# Altium PCB altium-experimental.pcbdoc
Units mil, origin at the board's own origin, x right, y up, seen from the top; angles counter-clockwise.
Board outline 5299.4 x 4105 mil, 2 copper layers (Top Layer, Bottom Layer); 37 components, 25 nets, 153 pads, 6 vias.
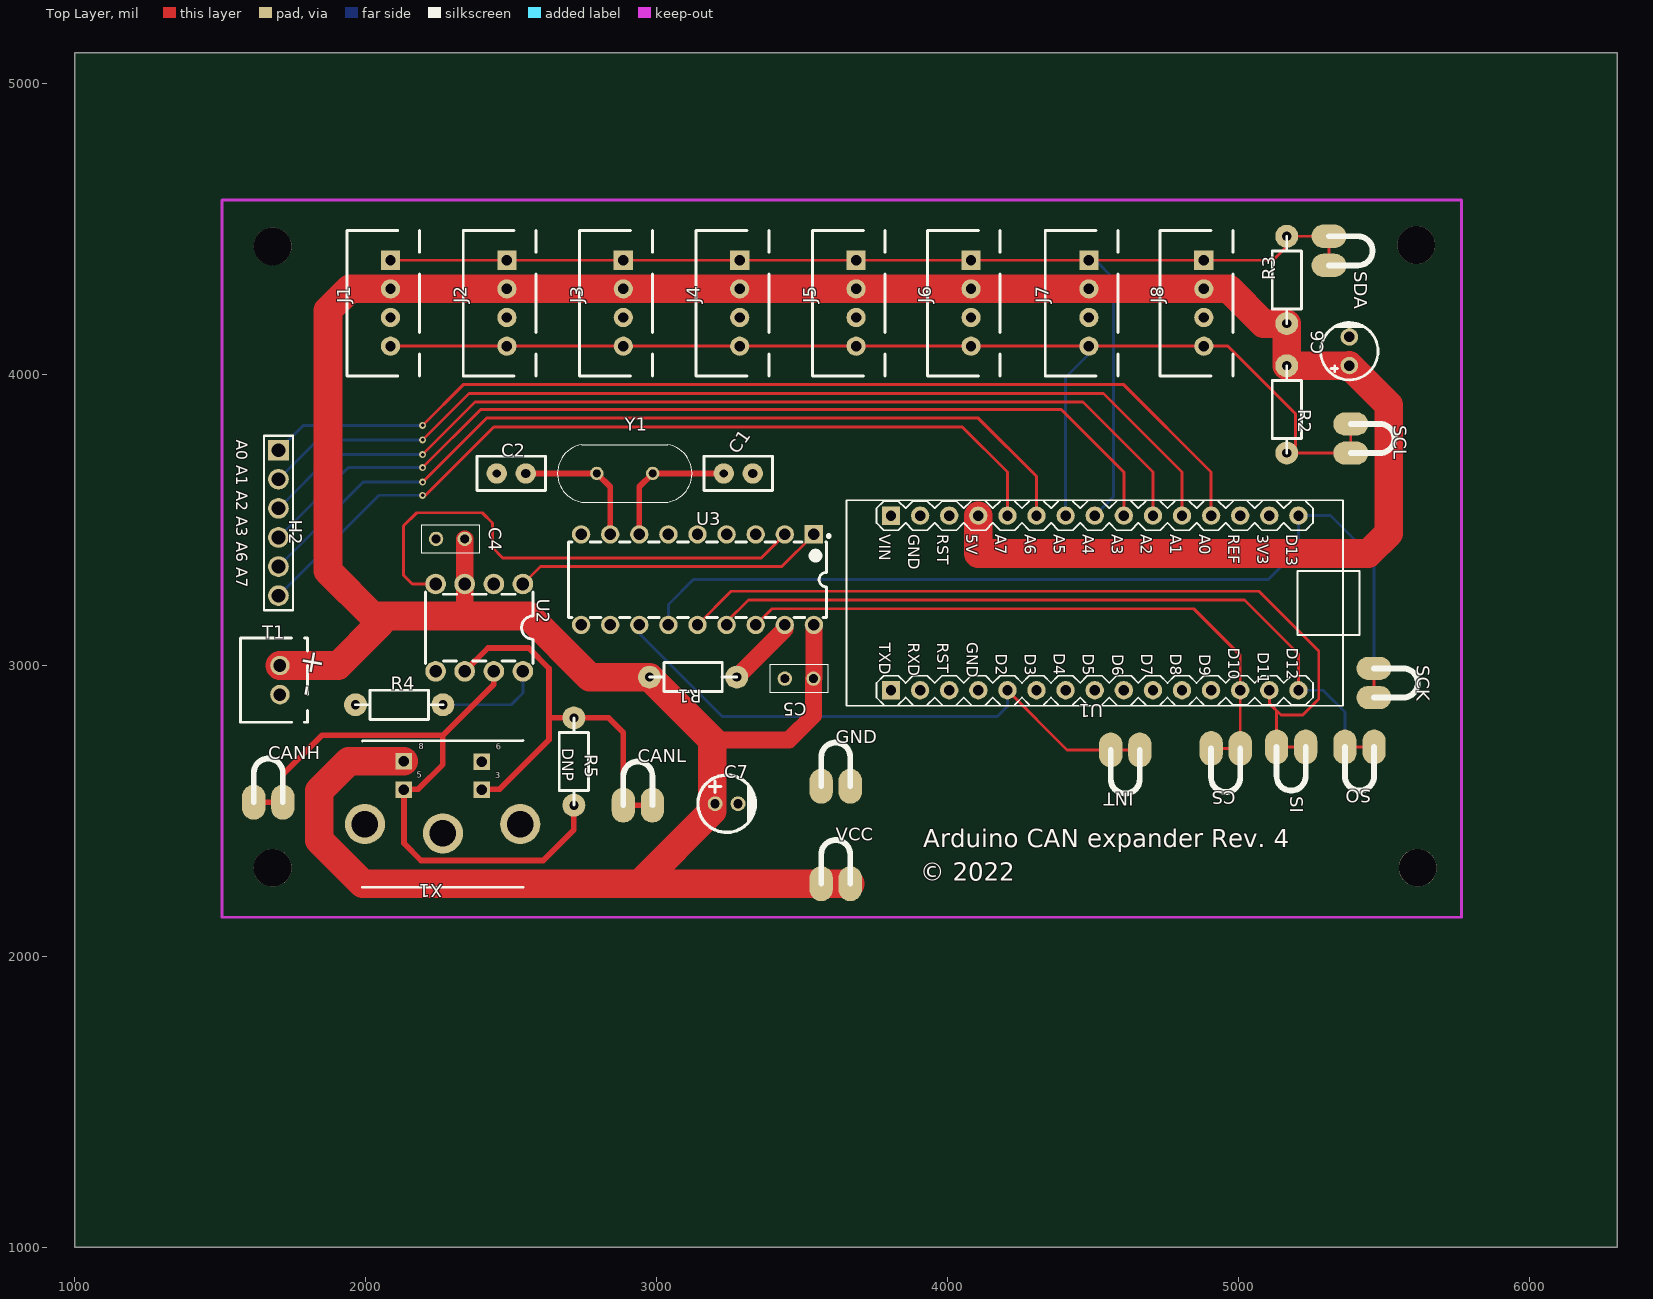
[diagram p0: Top Layer view]
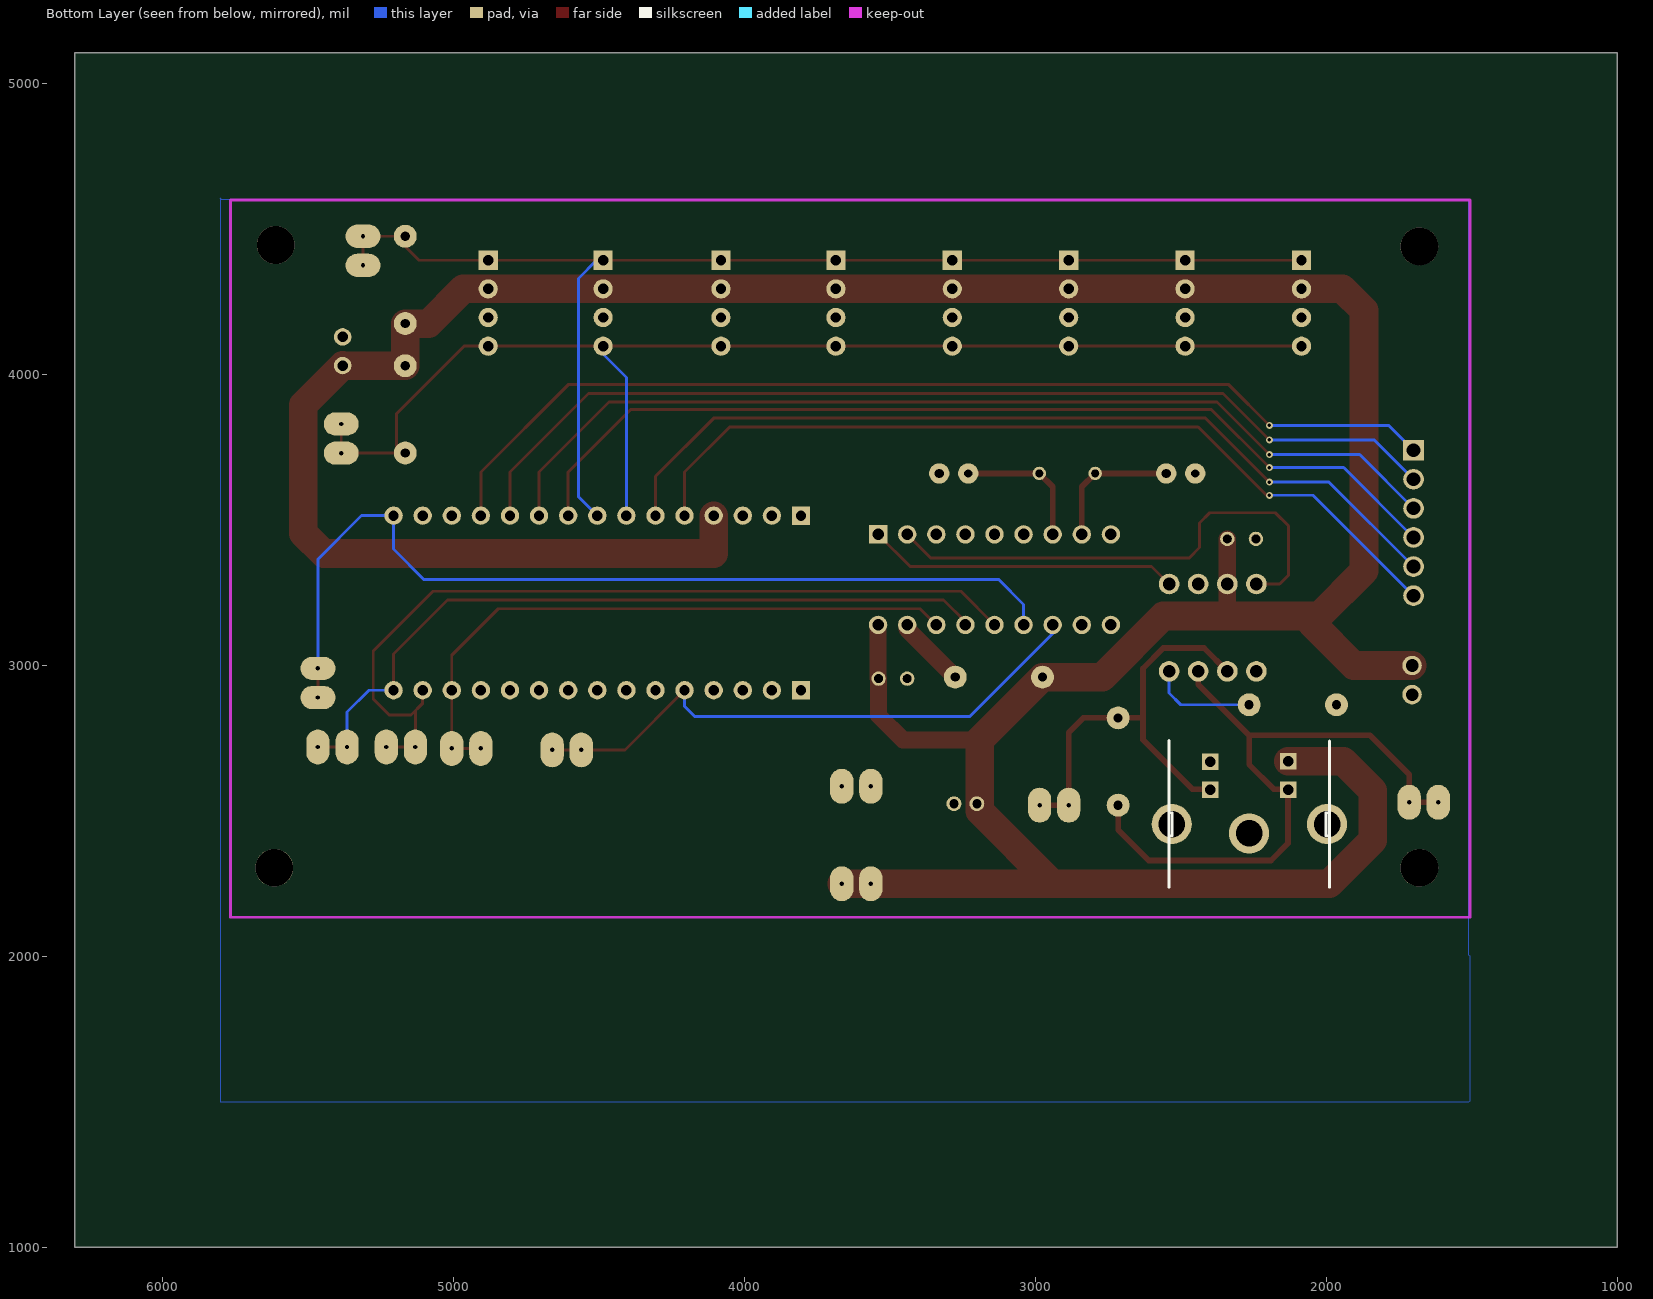
[diagram p1: Bottom Layer view, seen from below]

## Layer stack, top to bottom
Top Layer: signal copper (thickness not stored)
Dielectric: dielectric 12.6, FR-4, Dk 4.8
Bottom Layer: signal copper (thickness not stored)

## Board outline
6299.4,1000 1000,1000 1000,5105 6299.4,5105

## Components (designator, comment, footprint, x,y, rotation, side; value= is the part's Value field where it differs from the comment)
C1 "27pF" "CAPACITOR CERAMIC 2.5MM" 3279.4,3660 r270 top
C2 "27pF" "CAPACITOR CERAMIC 2.5MM" 2499.4,3660 r270 top
C4 "0.1uF" "CERAMIC MURATA 0.1UF 50V" 2339.4,3435 r180 top
C5 "0.1uF" "CERAMIC MURATA 0.1UF 50V" 3439.4,2955 r0 top
C6 "22uF" CAP-TH_BD5.0-P2.5-D0.5-FD 5379.4,4080 r90 top
C7 "100uF" CAP-TH_BD5.0-P2.00-D0.8-FD 3239.4,2525 r0 top
CANH "Test Point Loop" TEST-POINT-LOOP 1614.4,2530 r0 top
CANL "Test Point Loop" TEST-POINT-LOOP 2884.4,2520 r0 top
CS "Test Point Loop" TEST-POINT-LOOP 5004.4,2715 r180 top
GND "Test Point Loop" TEST-POINT-LOOP 3564.4,2585 r0 top
H2 "2.54 male" HDR-TH_6P-P2.54-V-M-1 1699.4,3490 r270 top
INT "Test Point Loop" TEST-POINT-LOOP 4659.4,2710 r180 top
J1 "JST-XH" JST-XH-4PIN-2.5#1 2084.4,4244.99 r90 top
J2 "JST-XH" JST-XH-4PIN-2.5#1 2484.4,4245 r90 top
J3 "JST-XH" JST-XH-4PIN-2.5#1 2884.4,4244.99 r90 top
J4 "JST-XH" JST-XH-4PIN-2.5#2 3284.4,4245 r90 top
J5 "JST-XH" JST-XH-4PIN-2.5#1 3684.4,4244.99 r90 top
J6 "JST-XH" JST-XH-4PIN-2.5#1 4079.4,4245 r90 top
J7 "JST-XH" JST-XH-4PIN-2.5#1 4484.4,4245 r90 top
J8 "JST-XH" JST-XH-4PIN-2.5#1 4879.4,4244.99 r90 top
R1 "10K" RESISTOR-AXIAL 3124.4,2960 r180 top
R2 "1.8K" RESISTOR-AXIAL 5164.4,3880 r270 top
R3 "1.8K" RESISTOR-AXIAL 5164.4,4325 r90 top
R4 "10K" RESISTOR-AXIAL 2114.4,2865 r180 top
R5 "DNP" RESISTOR-AXIAL 2714.43,2669.97 r270 top
SCK "Test Point Loop" TEST-POINT-LOOP 5464.4,2990 r270 top
SCL "Test Point Loop" TEST-POINT-LOOP 5384.4,3830 r270 top
SDA "Test Point Loop" TEST-POINT-LOOP 5309.4,4475 r270 top
SI "Test Point Loop" TEST-POINT-LOOP 5229.4,2720 r180 top
SO "Test Point Loop" TEST-POINT-LOOP 5464.4,2720 r180 top
T1 "JST XH 2P" "JST XH P2" 1704.4,2950 r90 top
U1 "ARDUINO_NANO" COMM-TH_ARDUINO_NANO 4504.4,3215 r180 top
U2 "MCP2551-I/P" PDIP-8_L9.3-W6.4-P2.54-LS7.6-BL 2389.4,3130 r180 top
U3 "MCP2515-I/P" PDIP-18_L22.5-W6.6-P2.54-LS7.9-BL 3139.4,3295 r180 top
VCC "Test Point Loop" TEST-POINT-LOOP 3564.4,2250 r0 top
X1 "MINI-DIN-4" M_DIN4 2264.4,2425 r180 top
Y1 "8Mhz 18pF" HC/49US_(AT49)PTH 2889.4,3660 r0 top

## Footprints (in the part's own frame and the unit in brackets; to place one, negate y for a bottom-side part, rotate by r counter-clockwise, add the part's x,y. Pads: shape width x height; smd on the part's side, far side on the other; paste and mask are expansions set on the pad)
CAP-TH_BD5.0-P2.00-D0.8-FD [mm]
  round 1.3 hole 0.8: 1(-1,0) 2(1,0)
  silkscreen extent -2.5,-2.5 2.5,2.5
CAP-TH_BD5.0-P2.5-D0.5-FD [mil]
  round 60 hole 36: 1(-49.21,0) 2(49.21,0)
  silkscreen extent -98,-98 98,98
"CAPACITOR CERAMIC 2.5MM" [mil]
  round 70 hole 31.5: 1(0,50)
  round 70 hole 28: 2(0,-50)
  silkscreen extent -59,-118 59,118
"CERAMIC MURATA 0.1UF 50V" [mil]
  round 49.53 hole 29.52 slot 29.53 at 0 deg: 1(0,0) 2(98.42,0)
  silkscreen extent -49,-49 148,49
COMM-TH_ARDUINO_NANO [mm]
  rect 1.6x1.6 hole 0.9: 1(17.78,7.62) 30(17.78,-7.62)
  round 1.6 hole 0.9: 2(15.24,7.62) 3(12.7,7.62) 4(10.16,7.62) 5(7.621,7.62) 6(5.08,7.62) 7(2.541,7.62) 8(0,7.62) 9(-2.539,7.62) 10(-5.08,7.62) 11(-7.619,7.62) 12(-10.16,7.62) 13(-12.699,7.62) 14(-15.24,7.62) 15(-17.78,7.62) 16(-17.78,-7.62) 17(-15.241,-7.62) 18(-12.7,-7.62) 19(-10.161,-7.62) 20(-7.62,-7.62) 21(-5.081,-7.62) 22(-2.54,-7.62) 23(-0.001,-7.62) 24(2.54,-7.62) 25(5.079,-7.62) 26(7.62,-7.62) 27(10.159,-7.62) 28(12.7,-7.62) 29(15.24,-7.62)
  silkscreen extent -23.11,-8.97 21.67,8.97
HC/49US_(AT49)PTH [mil]
  round 45.98 hole 25.98 slot 26.18 at 0 deg: 1(-96.06,0) 2(96.06,0)
  silkscreen extent -232,-98 232,98
HDR-TH_6P-P2.54-V-M-1 [mm]
  rect 1.8x1.8 hole 1.2: 1(-6.35,0)
  round 1.8 hole 1.2: 2(-3.81,0) 3(-1.27,0) 4(1.27,0) 5(3.81,0) 6(6.35,0)
  silkscreen extent -7.62,-1.27 7.62,1.27
"JST XH P2" [mm]
  round 1.7 hole 1.1: 1(1.27,0) 2(-1.27,0)
  silkscreen extent -3.68,-2.41 3.68,3.43
JST-XH-4PIN-2.5#1 [mil]
  rect 66x66 hole 35.43: 1(147.64,0)
  round 66 hole 35.43: 2(49.21,0) 3(-49.21,0) 4(-147.64,0)
  silkscreen extent -250,-100 250,150
JST-XH-4PIN-2.5#2 [mil]
  rect 66x65.98 hole 35.43: 1(147.64,0)
  round 66 hole 35.43: 2(49.21,0) 3(-49.21,0) 4(-147.64,0)
  silkscreen extent -250,-100 250,150
M_DIN4 [mil]
  rect 56x56 hole 35.4: 3(-134,-148) 5(134,-148) 6(-134,-244) 8(134,-246)
  round 137.8 hole 90.6: SH1(268,-30) SH2(0,2) SH3(-266,-30)
  silkscreen extent -276,-317 276,187
PDIP-8_L9.3-W6.4-P2.54-LS7.6-BL [mm]
  round 1.8 hole 1.1: 1(-3.81,-3.81) 2(-1.27,-3.81) 3(1.27,-3.81) 4(3.81,-3.81) 5(3.81,3.81) 6(1.27,3.81) 7(-1.27,3.81) 8(-3.81,3.81)
  silkscreen extent -4.7,-3.11 4.7,3.11
PDIP-18_L22.5-W6.6-P2.54-LS7.9-BL [mm]
  rect 1.6x1.6 hole 1: 1(-10.16,-3.95)
  round 1.6 hole 1: 2(-7.62,-3.95) 3(-5.08,-3.95) 4(-2.54,-3.95) 5(0,-3.95) 6(2.54,-3.95) 7(5.08,-3.95) 8(7.62,-3.95) 9(10.16,-3.95) 10(10.16,3.95) 11(7.62,3.95) 12(5.08,3.95) 13(2.54,3.95) 14(0,3.95) 15(-2.54,3.95) 16(-5.08,3.95) 17(-7.62,3.95) 18(-10.16,3.95)
  silkscreen extent -11.58,-3.93 11.25,3.3
RESISTOR-AXIAL [mm]
  round 2 hole 0.8: 1(-3.81,0) 2(3.81,0)
  silkscreen extent -3.81,-1.27 3.81,1.27
TEST-POINT-LOOP [mil]
  oval 80x120 hole 15: 1(0,0) 1(100,0)
  silkscreen extent 0,0 100,150

## Free pads (board coordinates)
  round 129.92 hole 129.92 unplated: ""(1679.4,2305) ""(1679.4,4440) ""(5609.4,4445) ""(5614.4,2305)

## Via types
v1: diameter 24.02, hole 12, Top Layer to Bottom Layer, tented both sides, 6 vias

## Nets (pads, with @x,y where several pads share a name; then routed paths per layer and width w, separated by ;. In a path a pad name is that pad's centre, name@x,y a point inside that pad or via, vN(x,y) a via of type N, cw(c..) or ccw(c..) an arc to the next point about the centre after c; other vN are vias at no path point)
GND: C1.1 C2.2 C4.2 C5.1 C6.2 C7.2 GND.1 J1.3 J2.3 J3.3 J4.3 J5.3 J6.3 J7.3 J8.3 R4.2 T1.2 U1.4 U2.2 U3.9 X1.6 X1.SH2
S$103: 
S$105: 
SCL: J1.4 J2.4 J3.4 J4.4 J5.4 J6.4 J7.4 J8.4 R2.2 SCL.1 U1.24 | length 4241.8
  Top Layer w10: J1.4 J2.4 J3.4 J4.4 J5.4 J6.4 J7.4 J8.4 ; J8.4 4962,4097.4 5194.4,3865 R2.2@5194.4,3730 ; R2.2@5199.4,3730 5384.4,3730 SCL.1@5384.4,3830
  Bottom Layer w10: U1.24 4404.4,3990 4484.4,4070 J7.4
SDA: J1.1 J2.1 J3.1 J4.1 J5.1 J6.1 J7.1 J8.1 R3.2 SDA.1 U1.23 | length 4347
  Top Layer w10: J1.1 J2.1 J3.1 J4.1 J5.1 J6.1 J7.1 J8.1 5117.03,4392.63 R3.2@5199.4,4475 ; R3.2 5309.4,4475 SDA.1@5309.4,4375
  Bottom Layer w10: J7.1 4506.76,4392.64 4569.4,4330 4569.4,3580 U1.23
U1_5: INT.1 U1.5 U3.12 | length 2022
  Top Layer w10: U1.5 4409.4,2710 4559.4,2710 INT.1@4659.4,2710
  Bottom Layer w10: U3.12 2939.4,3110 3224.4,2825 4169.4,2825 4204.4,2860 U1.5
U1_13: CS.1 U1.13 U3.16 | length 2174.3
  Top Layer w10: U3.16 3394.9,3195 4844.4,3195 5004.4,3035 U1.13 5004.4,2715 CS.1@4904.4,2715
U1_14: SI.1 U1.14 U3.14 | length 2992.5
  Top Layer w10: U3.14 3254.9,3255 5069.4,3255 5274.4,3050 5274.4,2885 5219.4,2830 5144.4,2830 5104.4,2870 ; SI.1@5229.4,2720 5129.4,2720 5129.4,2845 5104.4,2870 ; 5104.4,2870 U1.14 5104.4,2870
U1_15: SO.1 U1.15 U3.15 | length 2619.3
  Top Layer w10: U3.15 3239.4,3150 3314.4,3225 5019.4,3225 5204.4,3040 U1.15 ; SO.1@5364.4,2720 SO.1@5464.4,2720
  Bottom Layer w10: U1.15 5289.4,2915 5364.4,2840 SO.1@5364.4,2720
U1_16: SCK.1 U1.16 U3.13 | length 3226.3
  Top Layer w10: SCK.1@5464.4,2890 SCK.1@5464.4,2990
  Bottom Layer w10: U3.13 3039.4,3210 3124.4,3295 5099.4,3295 5204.4,3400 U1.16 5314.4,3515 5464.4,3365 SCK.1@5464.4,2990
U1_19: H2.1 U1.19 | length 3572.5
  Top Layer w10: v1(2194.4,3825) 2334.4,3965 4604.4,3965 4904.4,3665 U1.19
  Bottom Layer w10: H2.1 1784.4,3825 v1(2194.4,3825)
U1_20: H2.2 U1.20 | length 3489
  Top Layer w10: v1(2194.4,3775) 2354.4,3935 4534.4,3935 4804.4,3665 U1.20
  Bottom Layer w10: H2.2 1834.4,3775 v1(2194.4,3775)
U1_21: H2.3 U1.21 | length 3405.6
  Top Layer w10: v1(2194.4,3725) 2374.4,3905 4464.4,3905 4704.4,3665 U1.21
  Bottom Layer w10: H2.3 1884.4,3725 v1(2194.4,3725)
U1_22: H2.4 U1.22 | length 3326.3
  Top Layer w10: v1(2194.4,3680) 2394.4,3880 4389.4,3880 4604.4,3665 U1.22
  Bottom Layer w10: H2.4 1939.4,3680 v1(2194.4,3680)
U1_25: H2.5 U1.25 | length 3034.1
  Top Layer w10: v1(2194.4,3630) 2414.4,3850 4104.4,3850 4304.4,3650 U1.25
  Bottom Layer w10: H2.5 1989.4,3630 v1(2194.4,3630)
U1_26: H2.6 U1.26 | length 2959.4
  Top Layer w10: v1(2194.4,3585) 2204.4,3585 2439.4,3820 4049.4,3820 4204.4,3665 U1.26
  Bottom Layer w10: H2.6 2044.4,3585 v1(2194.4,3585)
U2_1: U2.1 U3.1 | length 1070.6
  Top Layer w10: U2.1 2599.4,3340 3428.89,3340 U3.1
U2_4: U2.4 U3.2 | length 1768.4
  Top Layer w10: U2.4 2159.4,3280 2129.4,3310 2129.4,3480 2174.4,3525 2399.4,3525 2434.4,3490 2434.4,3405 2469.4,3370 3358.9,3370 U3.2
U2_6: CANL.1 R5.1 U2.6 X1.3 | length 1523.2
  Top Layer w19.68: U2.6 2419.4,3060 2559.4,3060 2629.4,2990 2629.4,2745 2459.4,2575 X1.3@2399.4,2575 ; 2629.4,2819.97 R5.1 2834.43,2819.97 2884.4,2770 2884.4,2520 CANL.1@2984.4,2520
U2_7: CANH.1 R5.2 U2.7 X1.5 | length 2283.5
  Top Layer w19.68: CANH.1@1614.4,2530 1714.4,2530 1714.4,2625 1849.4,2760 2264.31,2760 ; X1.5 2130.4,2389 2189.4,2330 2609.4,2330 2714.4,2435 R5.2 ; X1.5@2130.4,2575 2179.4,2575 2264.4,2660 2264.4,2760 2439.4,2935 U2.7
U2_8: R4.1 U2.8 | length 366.6
  Bottom Layer w10: R4.1 2499.4,2865 2539.4,2905 U2.8
U3_7: C1.2 U3.7 Y1.2 | length 472.5
  Top Layer w19.68: U3.7 2939.4,3613.94 Y1.2 C1.2
U3_8: C2.1 U3.8 Y1.1 | length 472.5
  Top Layer w19.68: C2.1 Y1.1 2839.4,3613.94 U3.8
U3_17: R1.1 U3.17 | length 247.8
  Top Layer w59.05: R1.1 3439.4,3125 U3.17
VCC: C4.1 C5.2 C6.1 C7.1 J1.2 J2.2 J3.2 J4.2 J5.2 J6.2 J7.2 J8.2 R1.2 R2.1 R3.1 T1.1 U1.27 U2.3 U3.18 VCC.1 X1.8 | length 12739.2
  Top Layer w59.05: 2339.4,3175 U2.3 C4.1 ; 3190.5,2743.9 3453.3,2743.9 3537.8,2828.4 C5.2 3539.4,2956.58 U3.18
  Top Layer w98.42: T1.1 1904.4,3000 2049.4,3145 ; J1.2 J2.2 J3.2 J4.2 J5.2 J6.2 J7.2 J8.2 4965.2,4294.2 5084.4,4175 R3.1 R2.1 C6.1 5514.4,3895 5514.4,3455 5444.4,3385 4104.4,3385 U1.27 ; J1.2@2084.4,4295 1944.4,4295 1869.4,4220 1869.4,3325 2024.4,3170 2559.4,3170 2769.4,2960 R1.2 3190.5,2743.9 3190.5,2500 2940.5,2250 ; X1.8 1940.4,2671 1839.4,2570 1839.4,2400 1989.4,2250 2940.5,2250 ; VCC.1@3664.4,2250 3564.4,2250 2940.5,2250
pads on no net: U1.1 U1.2 U1.3 U1.6 U1.7 U1.8 U1.9 U1.10 U1.11 U1.12 U1.17 U1.18 U1.28 U1.29 U1.30 U2.5 U3.3 U3.4 U3.5 U3.6 U3.10 U3.11 X1.SH1 X1.SH3

## Polygon pours and split planes (outlines as drawn)
GND on Bottom Layer (solid): 1509.4,4600 5794.4,4600 5799.4,4605 5799.4,1500 1509.4,1500 1504.4,1505 1504.4,2000 1509.4,2005

## Silkscreen, mask and mechanical layers (free items; w line width, h text height)
Top Overlay:
  text "A0 A1 A2 A3 A6 A7" at 1554.71,3775 h39.37 r270
  text "+ -" at 1790.63,3061.84 h78.74 r260
  text "DNP" at 2674.72,2715 h39.37 r270
  text "Arduino CAN expander Rev. 4" at 3914.4,2355 h106.3
  text "© 2022" at 3904.4,2240 h106.3

## Text inside footprints (layer, text, board x,y; h text height)
U1: Top Overlay "D13" at 5163.15,3450.83 h39.37 r270; Top Overlay "3V3" at 5063.15,3450.83 h39.37 r270; Top Overlay "REF" at 4963.15,3450.83 h39.37 r270; Top Overlay "A0" at 4863.15,3450.83 h39.37 r270; Top Overlay "A1" at 4763.15,3450.83 h39.37 r270; Top Overlay "A2" at 4663.15,3450.83 h39.37 r270; Top Overlay "A3" at 4563.15,3450.83 h39.37 r270; Top Overlay "A4" at 4463.15,3450.83 h39.37 r270; Top Overlay "A5" at 4363.15,3450.83 h39.37 r270; Top Overlay "A6" at 4263.15,3450.83 h39.37 r270; Top Overlay "A7" at 4163.15,3450.83 h39.37 r270; Top Overlay "5V" at 4063.14,3450.83 h39.37 r270; Top Overlay "RST" at 3963.14,3450.83 h39.37 r270; Top Overlay "GND" at 3863.14,3450.83 h39.37 r270; Top Overlay "VIN" at 3763.14,3450.83 h39.37 r270; Top Overlay "D12" at 5163.93,3061.5 h39.37 r270; Top Overlay "D11" at 5063.93,3045.4 h39.37 r270; Top Overlay "D10" at 4963.93,3061.5 h39.37 r270; Top Overlay "D9" at 4863.93,3038.9 h39.37 r270; Top Overlay "D8" at 4763.93,3040.7 h39.37 r270; Top Overlay "D7" at 4663.93,3040.7 h39.37 r270; Top Overlay "D6" at 4563.93,3038.9 h39.37 r270; Top Overlay "D5" at 4463.93,3040.7 h39.37 r270; Top Overlay "D4" at 4363.93,3042.5 h39.37 r270; Top Overlay "D3" at 4263.93,3040.7 h39.37 r270; Top Overlay "D2" at 4163.93,3040.7 h39.37 r270; Top Overlay "GND" at 4063.93,3079.4 h39.37 r270; Top Overlay "RST" at 3963.93,3077.6 h39.37 r270; Top Overlay "RXD" at 3863.93,3077.6 h39.37 r270; Top Overlay "TXD" at 3763.93,3077.6 h39.37 r270
X1: Top Overlay "3" at 2444.4,2613 h20; Top Overlay "5" at 2174.4,2615 h20; Top Overlay "6" at 2448.27,2711.04 h20 r5; Top Overlay "8" at 2181.4,2713 h20